# Altium PCB pcb gara.PcbDoc
Units mm, origin at the board's own origin, x right, y up, seen from the top; angles counter-clockwise.
Board outline 105.92 x 71.5 mm, 2 copper layers (Top Layer, Bottom Layer); 23 components, 20 nets, 77 pads, 4 vias.
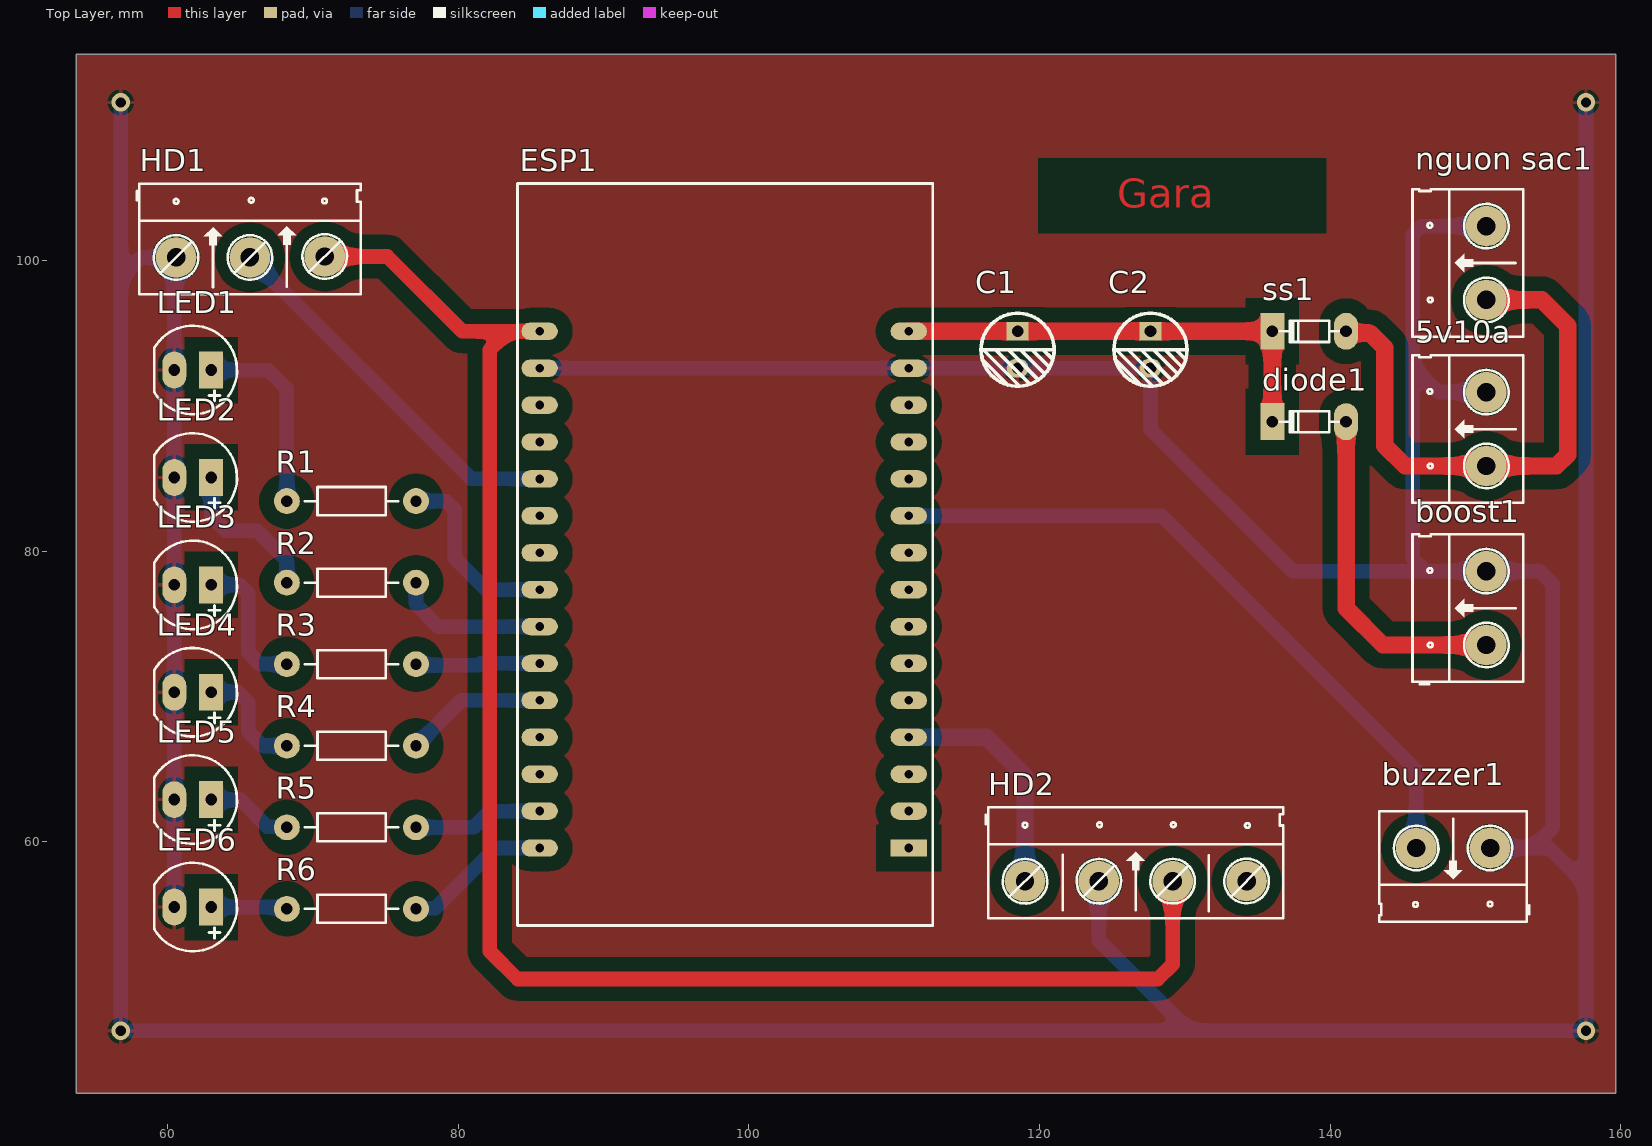
[diagram p0: Top Layer view]
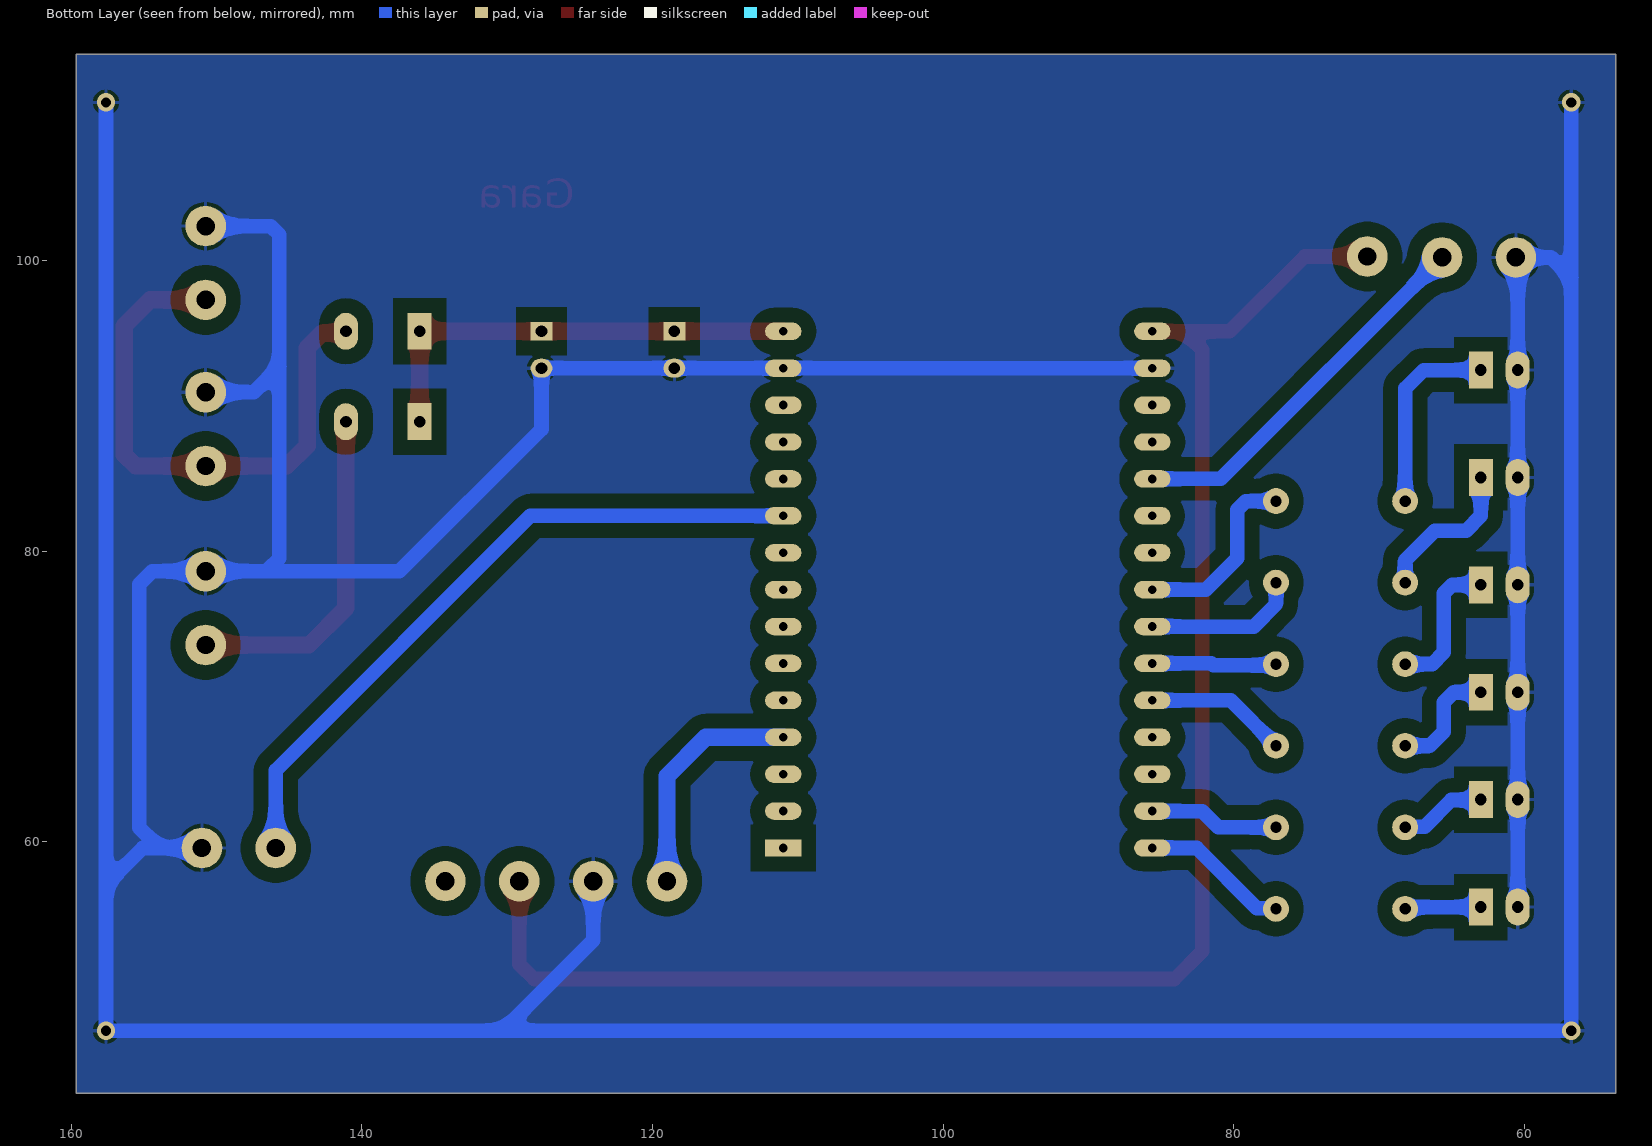
[diagram p1: Bottom Layer view, seen from below]
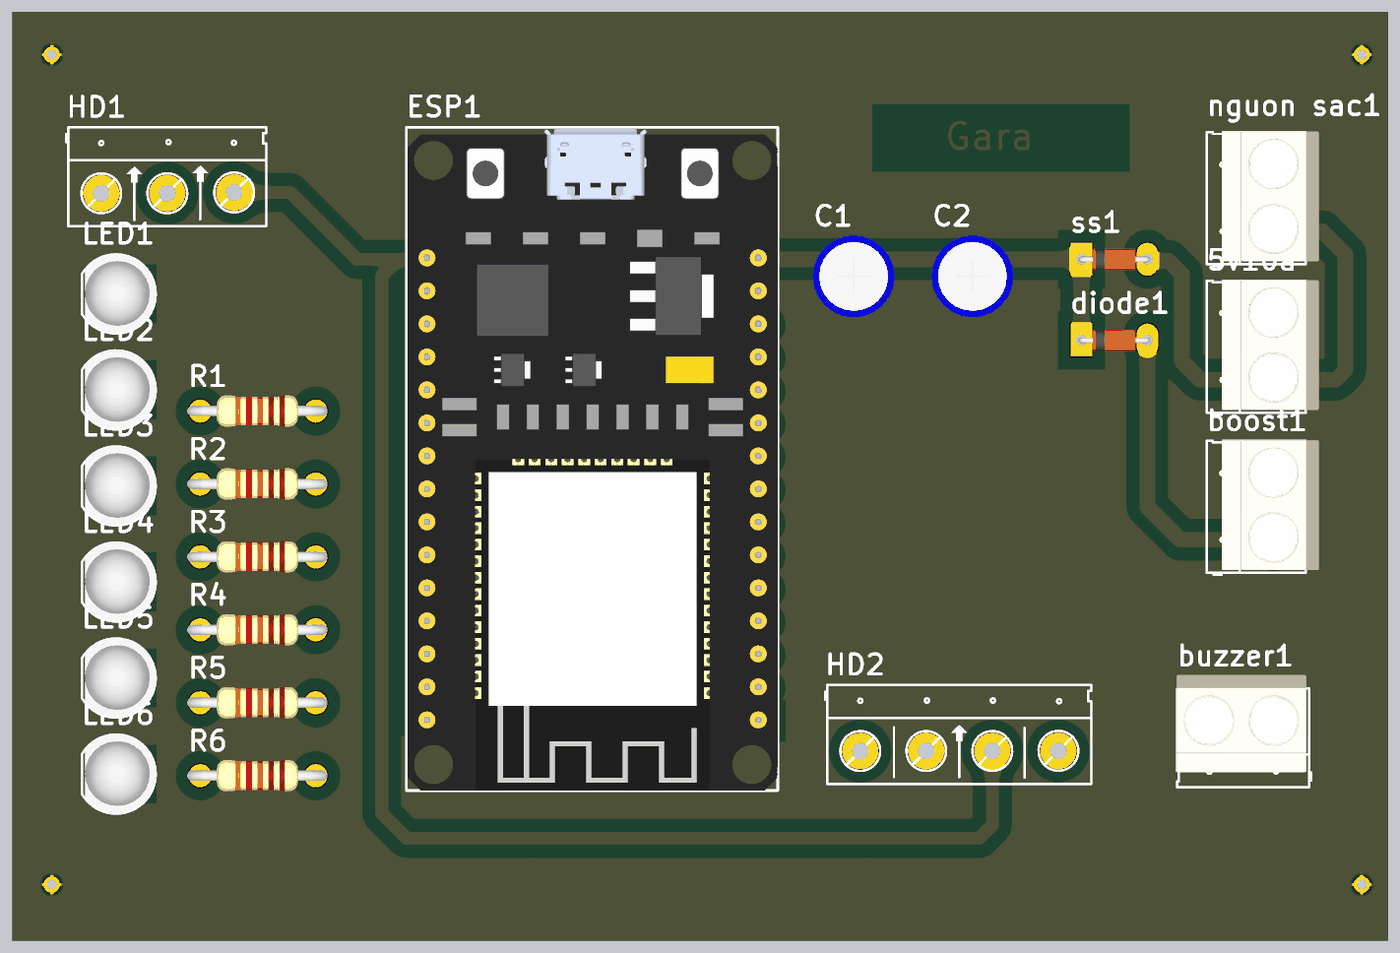
[diagram p2: 3D render of the assembled board from above, using the file's embedded part models]

## Layer stack, top to bottom
Top Solder: solder mask 0.0102, Solder Resist, Dk 3.5
Top Layer: signal copper 0.0356
Dielectric 1: dielectric 0.32, FR-4, Dk 4.8
Bottom Layer: signal copper 0.0356
Bottom Solder: solder mask 0.0102, Solder Resist, Dk 3.5

## Board outline
53.721,42.672 159.639,42.672 159.639,114.173 53.721,114.173

## Design rules (kind name [scope] priority, off if disabled: settings)
Clearance [All] p1: gap=1 ignorepadtopadclearanceinfootprint=FALSE
PolygonConnect [All] p1: connectstyle=Relief reliefconductorwidth=0.254 reliefentries=4 polygonreliefangle="90 Angle" airgapwidth=0.254
RoutingCorners [All] p1: cornerstyle=45-Degree minsetback=1 maxsetback=1
RoutingVias [All] p1: holewidth=0.711 width=1.27 viastyle="Through Hole" minholewidth=0.711 minwidth=1.27 maxholewidth=0.711 maxwidth=1.27
SolderMaskExpansion [All] p1: expansion=0.102 istentingtop=FALSE
Width [All] p1: maxlimit=1.2 minlimit=0.8 preferedwidth=1
29 further rules are at their usual default settings.

## Components (designator, comment, footprint, x,y, rotation, side; value= is the part's Value field where it differs from the comment)
5v10a "Header 2_1" HED2 150.749,85.852 r90 top value="Header 2"
boost1 "Header 2_1" HED2 150.749,73.533 r90 top value="Header 2"
buzzer1 "Header 2_1" HED2 151.003,59.563 r180 top value="Header 2"
C1 "0.1uF" "tu hoa 5mm" 118.491,93.853 r270 top
C2 "47uF" "tu hoa 5mm" 127.635,93.853 r270 top
diode1 "100v" "DIODE 0.5A" 138.557,88.9 r0 top
ESP1 "ESP32 DEVKIT" "ESP32 WROOM 32 KIT" 110.998,59.563 r180 top
HD1 "DHT BEP" HED3 60.579,100.203 r0 top value="Header 3"
HD2 "FLAMESENSOR" HED4 118.997,57.275 r0 top value="Header 4"
LED1 "LED" LED-5-Green 62.992,92.456 r180 top value="LED 3 ly Single Colour"
LED2 "LED" LED-5-Green 62.992,85.065 r180 top value="LED 3 ly Single Colour"
LED3 "LED" LED-5-Green 62.992,77.673 r180 top value="LED 3 ly Single Colour"
LED4 "LED" LED-5-Green 62.992,70.282 r180 top value="LED 3 ly Single Colour"
LED5 "LED" LED-5-Green 62.992,62.89 r180 top value="LED 3 ly Single Colour"
LED6 "LED" LED-5-Green 62.992,55.499 r180 top value="LED 3 ly Single Colour"
"nguon sac1" "Header 2_1" HED2 150.749,97.282 r90 top value="Header 2"
R1 "330" R1/4W 68.199,83.439 r0 top value="R1/4W - 1K"
R2 "330" R1/4W 68.199,77.826 r0 top value="R1/4W - 1K"
R3 "330" R1/4W 68.199,72.212 r0 top value="R1/4W - 1K"
R4 "330" R1/4W 68.199,66.599 r0 top value="R1/4W - 1K"
R5 "330" R1/4W 68.199,60.985 r0 top value="R1/4W - 1K"
R6 "330" R1/4W 68.199,55.372 r0 top value="R1/4W - 1K"
ss1 "100v" "DIODE 0.5A" 138.557,95.123 r0 top

## Footprints (in the part's own frame and the unit in brackets; to place one, negate y for a bottom-side part, rotate by r counter-clockwise, add the part's x,y. Pads: shape width x height; smd on the part's side, far side on the other; paste and mask are expansions set on the pad)
"DIODE 0.5A" [mil] "Diode muoi, xung"
  oval 65x100 hole 32: 1(100,0)
  rect 65x100 hole 32: 2(-100,0)
  silkscreen extent -80,-30 80,28, body extent -108,-33 108,32, height 61
"ESP32 WROOM 32 KIT" [mm]
  rect 2.5x1.2 hole 0.6: 1(0,0)
  oval 2.5x1.2 hole 0.6: 2(0,-2.54) 3(0,-5.08) 4(0,-7.62) 5(0,-10.16) 6(0,-12.7) 7(0,-15.24) 8(0,-17.78) 9(0,-20.32) 10(0,-22.86) 11(0,-25.4) 12(0,-27.94) 13(0,-30.48) 14(0,-33.02) 15(0,-35.56) 16(25.4,-35.56) 17(25.4,-33.02) 18(25.4,-30.48) 19(25.4,-27.94) 20(25.4,-25.4) 21(25.4,-22.86) 22(25.4,-20.32) 23(25.4,-17.78) 24(25.4,-15.24) 25(25.4,-12.7) 26(25.4,-10.16) 27(25.4,-7.62) 28(25.4,-5.08) 29(25.4,-2.54) 30(25.4,0)
  silkscreen extent -1.65,-45.72 26.92,5.33, body extent -1.65,-45.6 26.85,5.33, height 10.49
HED2 [mil] "Header 2, 2 pin, hight 300mil, Pin to Pin 200, Colour Green"
  round 110 hole 50: 1(0,0) 2(200,0)
  silkscreen extent -106,-100 300,200, body extent -92,-140 302,155, height 394
HED3 [mil] "Header 3, 3 pin, hight 300mil, Pin to Pin 200, Colour Green"
  round 110 hole 50: 1(0,0) 2(200,0) 3(402.62,2.62)
  silkscreen extent -106,-100 500,200
HED4 [mil] "Header 4, 4 pin, hight 300mil, Pin to Pin 200, Colour Green"
  round 110 hole 50: 1(0,0) 2(200,0) 3(400.06,0.06) 4(600.39,0.39)
  silkscreen extent -106,-100 700,200
LED-5-Green [mil] "LED 2 PIN, 5 ly , Only colour,pin to pin 100mil"
  rect 65x100 hole 32: 1(0,0)
  oval 65x100 hole 32: 2(100,0)
  silkscreen extent -70,-120 154,120, body extent -69,-120 145,117, height 339
R1/4W [mil] "R 1/4W, 2 Pin, 350mil"
  round 70 hole 31: 1(0,0) 2(350,0)
  silkscreen extent 48,-38 302,38, body extent -40,-47 386,47, height 111
"tu hoa 5mm" [mm]
  rect 1.3x1.5 hole 0.8: 1(-1.27,0)
  oval 1.3x1.5 hole 0.8: 2(1.27,0)
  silkscreen extent -2.51,-2.51 2.51,2.51, body extent -3.12,-3.18 3.23,3.18, height 14.55

## Part data
5v10a boost1 buzzer1 "nguon sac1": "Header, 2-Pin", Manufacturer="Generic Components", Class=Connector
C1: library part "Tu Hoa 0.1uF 50V 5x11", "Cắm", Chung_Loai=Cắm, Don_Vi=Con, Ma_Hang=MH006853, So_Chan=2, Ten_Linh_Kien="Tụ Hóa 0.1uF 50V"
C2: library part "Tu Hoa 47uF 16V 5x10", "Cắm", Chung_Loai=Cắm, Don_Vi=Con, Ma_Hang=MH006859, So_Chan=2, Ten_Linh_Kien="Tụ Hóa 47uF 16V"
diode1 ss1: library part "Diode 1N4148", "Cắm", Chung_Loai=Cắm, Don_Vi=Con, Ma_Hang=MH001065, Ten_Linh_Kien="Diode 1N4148 DO35 450mA 100V ( 1N4148 DIP)"
ESP1: library part "ESP32 WROOM 32 KIT"
HD1: library part Hed3, "Header 3 (Green)"
HD2: library part Hed4, "Header 4 (Green)"
LED1 LED2 LED3 LED4 LED5 LED6: "LED Single colour Green and Red"
R1 R2 R3 R4 R5 R6: library part R1/4W, "Resistor 1/4W"

## Via types
v1: diameter 1.27, hole 0.711, Top Layer to Bottom Layer, 4 vias

## Nets (pads, with @x,y where several pads share a name; then routed paths per layer and width w, separated by ;. In a path a pad name is that pad's centre, name@x,y a point inside that pad or via, vN(x,y) a via of type N, cw(c..) or ccw(c..) an arc to the next point about the centre after c; other vN are vias at no path point)
3v3: ESP1.16 HD1.3 HD2.3 | length 114
  Top Layer w1: HD1.3 75.117,100.27 80.264,95.123 83.439,95.123 ; ESP1.16 83.439,95.123 ; HD2.3 129.159,51.562 128.143,50.546 84.074,50.546 82.169,52.451 82.169,93.853 83.439,95.123
5v: C1.1 C2.1 diode1.2 ESP1.15 ss1.2 | length 31.2
  Top Layer w1.2: ESP1.15 C1.1 C2.1 ss1.2 diode1.2
"a0 flame": ESP1.4 HD2.1 | length 16.3
  Bottom Layer w1.2: ESP1.4 116.332,67.183 118.997,64.518 HD2.1
chung: 5v10a.1 "nguon sac1.1" ss1.1 | length 38.6
  Top Layer w1.2: ss1.1 141.214,95.006 142.738,95.006 143.764,93.98 143.764,87.249 145.161,85.852 5v10a.1 155.575,85.852 156.337,86.614 156.337,95.504 154.559,97.282 150.749,97.282
data: ESP1.20 HD1.2 | length 26.3
  Bottom Layer w1: HD1.2 80.899,84.963 ESP1.20
gnd: 5v10a.2 "nguon sac1.2" boost1.2 buzzer1.1 C1.2 C2.2 ESP1.14 ESP1.17 HD1.1 HD2.2 LED1.2 LED2.2 LED3.2 LED4.2 LED5.2 LED6.2 | length 429.9
  Bottom Layer w1: v1(56.769,110.871) 56.769,98.806 ; LED6.2@60.48,55.471 LED6.2 LED5.2 LED4.2 LED3.2 LED2.2 LED1.2 60.452,100.076 HD1.1 58.166,100.203 56.769,98.806 ; ESP1.17 ESP1.14 C1.2 C2.2 127.635,88.392 137.414,78.613 boost1.2 154.432,78.613 155.321,77.724 155.321,60.96 153.924,59.563 ; HD2.2 124.077,53.215 130.302,46.99 ; 146.431,78.74 145.669,79.502 145.669,92.71 ; 5v10a.2 147.447,90.932 145.669,92.71 ; 150.749,102.362 146.255,102.362 145.669,101.776 145.669,92.71 ; buzzer1.1 153.924,59.563 ; v1(157.607,110.871) 157.607,57.023 ; 56.769,98.806 v1(56.769,46.99) 130.302,46.99 ; 130.302,46.99 v1(157.607,46.99) 157.607,57.023 ; 153.924,59.563 155.067,59.563 157.607,57.023
L1: ESP1.23 R1.2 | length 13
  Bottom Layer w1: R1.2 79.17,83.439 79.756,82.853 79.756,79.502 81.915,77.343 ESP1.23
L2: ESP1.24 R2.2 | length 10.6
  Bottom Layer w1: R2.2 77.089,76.327 78.613,74.803 ESP1.24
L3: ESP1.25 R3.2 | length 8.6
  Bottom Layer w1: R3.2 77.165,72.136 81.407,72.136 81.534,72.263 ESP1.25
L4: ESP1.26 R4.2 | length 9.8
  Bottom Layer w1: R4.2 80.213,69.723 ESP1.26
L5: ESP1.29 R5.2 | length 9
  Bottom Layer w1: R5.2 81.051,60.985 82.169,62.103 ESP1.29
L6: ESP1.30 R6.2 | length 10.2
  Bottom Layer w1: R6.2 77.143,55.426 78.413,55.426 82.55,59.563 ESP1.30
Netboost1_1: boost1.1 diode1.1 | length 23.5
  Top Layer w1.2: diode1.1 141.097,76.073 143.637,73.533 boost1.1
Netbuzzer1_2: buzzer1.2 ESP1.10 | length 47.5
  Bottom Layer w1: ESP1.10 128.397,82.423 145.923,64.897 buzzer1.2
NetLED1_1: LED1.1 R1.1 | length 13.5
  Bottom Layer w1: LED1.1 66.929,92.456 68.199,91.186 R1.1
NetLED2_1: LED2.1 R2.1 | length 10.7
  Bottom Layer w1: LED2.1 62.992,82.423 64.008,81.407 66.167,81.407 68.199,79.375 R2.1
NetLED3_1: LED3.1 R3.1 | length 9.8
  Bottom Layer w1: LED3.1 64.946,77.673 65.532,77.087 65.532,73.025 66.345,72.212 R3.1
NetLED4_1: LED4.1 R4.1 | length 7.9
  Bottom Layer w1: LED4.1 64.846,70.282 65.532,69.596 65.532,67.564 66.497,66.599 R4.1
NetLED5_1: LED5.1 R5.1 | length 6
  Bottom Layer w1: LED5.1 63.292,62.89 63.317,62.865 65.024,62.865 66.862,61.027 68.157,61.027 R5.1
NetLED6_1: LED6.1 R6.1 | length 5.3
  Bottom Layer w1: LED6.1 68.072,55.499 R6.1
pads on no net: ESP1.1 ESP1.2 ESP1.3 ESP1.5 ESP1.6 ESP1.7 ESP1.8 ESP1.9 ESP1.11 ESP1.12 ESP1.13 ESP1.18 ESP1.19 ESP1.21 ESP1.22 ESP1.27 ESP1.28 HD2.4

## Polygon pours and split planes (outlines as drawn)
gnd on Bottom Layer "GND_L02_P000" (solid, pour order 0): 53.721,114.173 159.639,114.173 159.639,42.672 53.721,42.672
gnd on Top Layer "GND_L01_P001" (solid, pour order 1): 53.721,114.173 159.639,114.173 159.639,42.672 53.721,42.672

## Other copper
Top Layer:
  text "Gara" at 125.349,103.632 h2